# Altium PCB FRM-X33_LAN_UART Adapter.PcbDoc
Units mm, origin at the board's own origin, x right, y up, seen from the top; angles counter-clockwise.
Board outline 35 x 20 mm, 2 copper layers (Top Layer, Bottom Layer); 13 components, 10 nets, 57 pads, 15 vias.
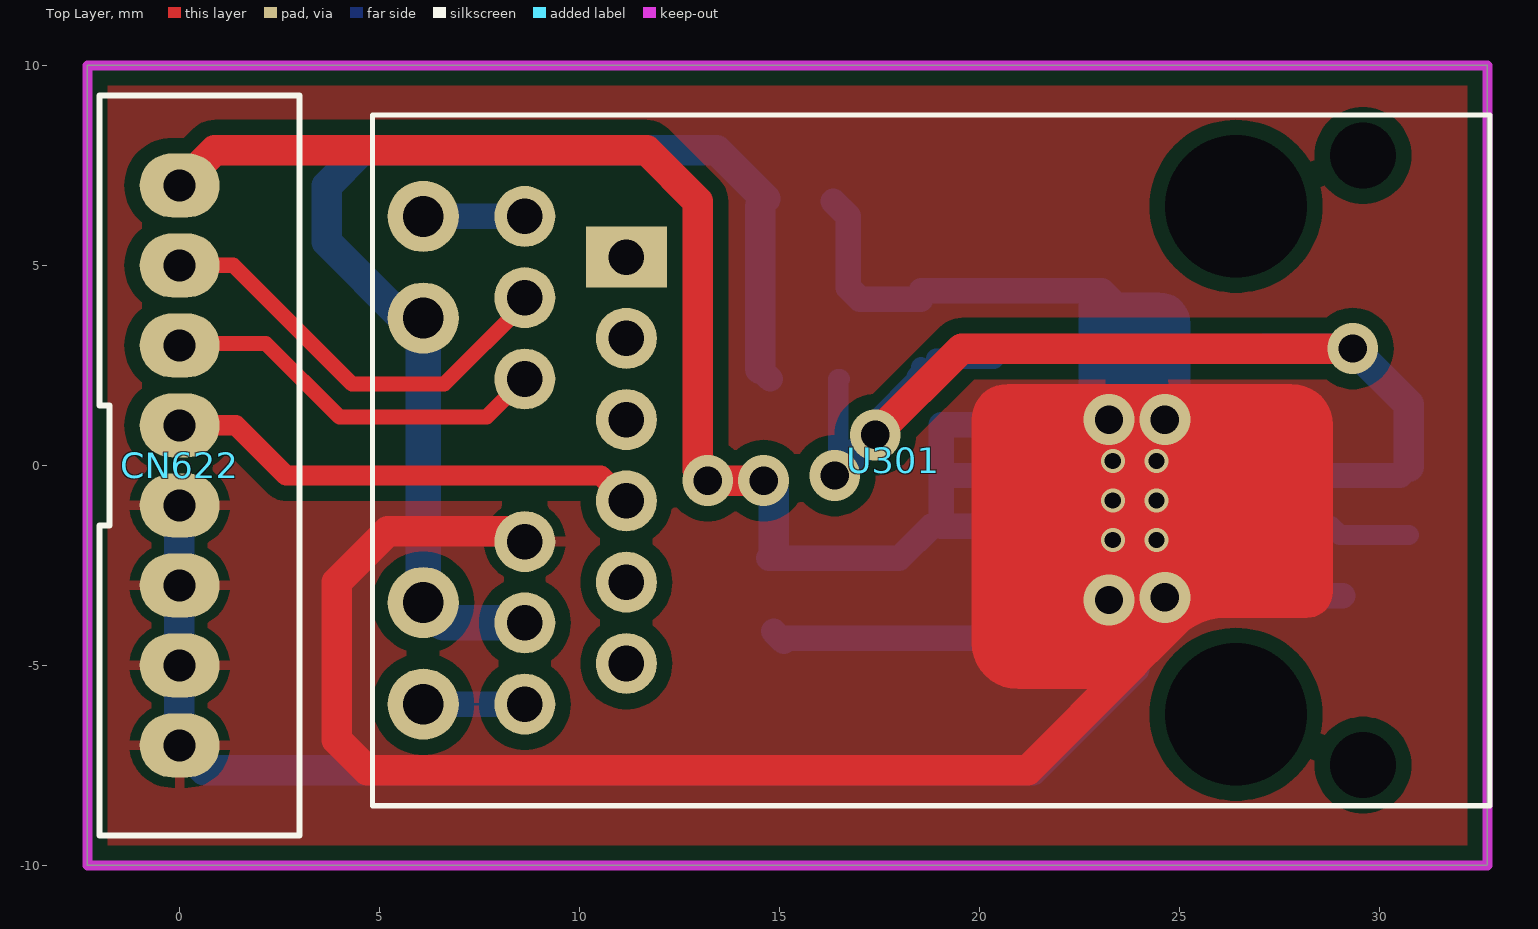
[diagram p0: Top Layer view]
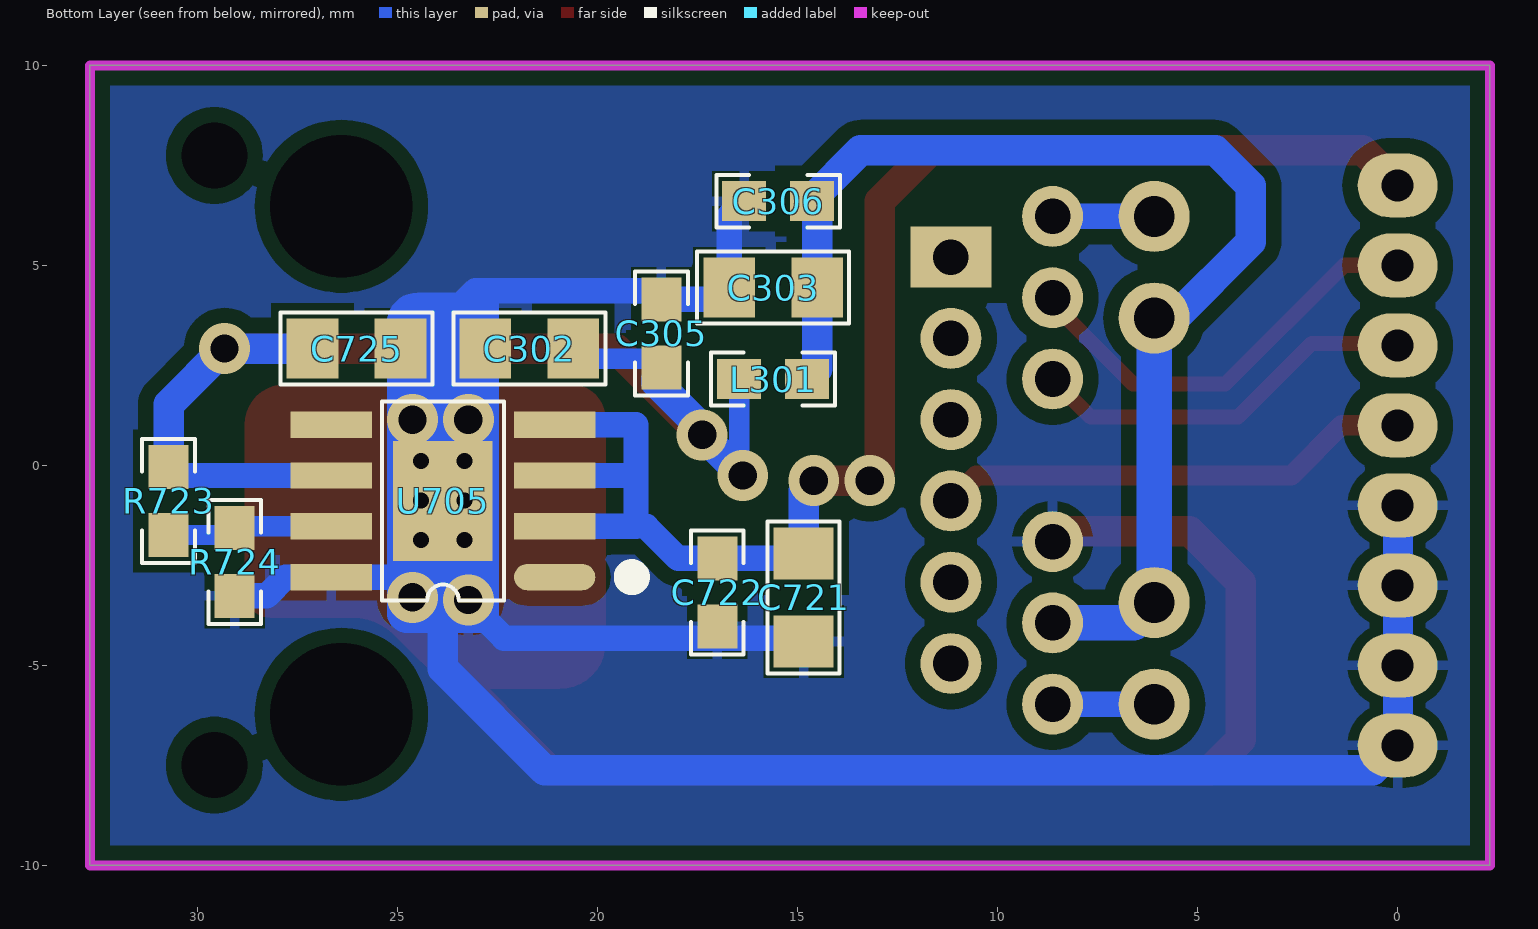
[diagram p1: Bottom Layer view, seen from below]
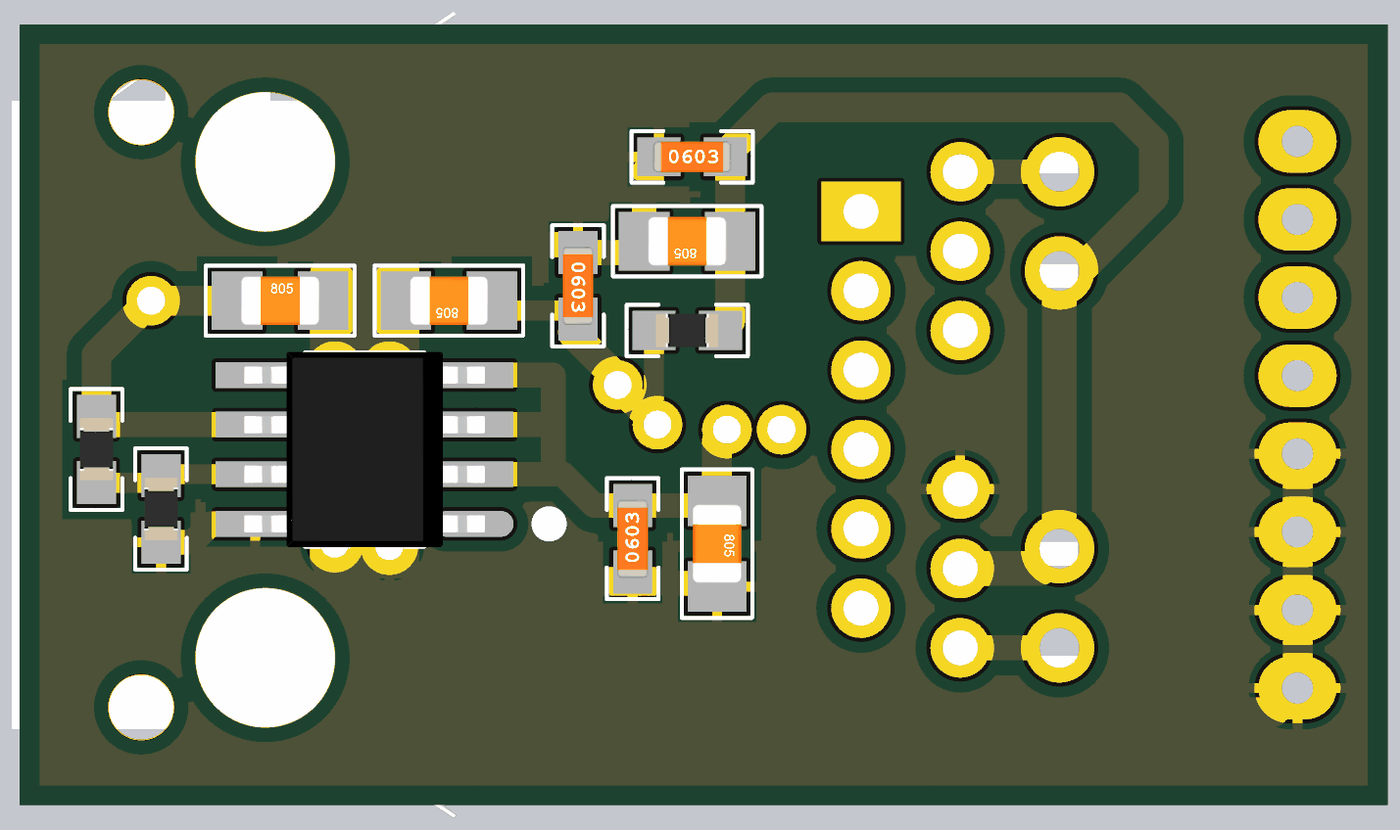
[diagram p2: 3D render of the assembled board from below, using the file's embedded part models]

## Layer stack, top to bottom
Top Solder: solder mask 0.0102, Solder Resist, Dk 3.5
Top Layer: signal copper 0.0356
Dielectric 1: dielectric 0.32, FR-4, Dk 4.8
Bottom Layer: signal copper 0.0356
Bottom Solder: solder mask 0.0102, Solder Resist, Dk 3.5

## Board outline
-2.3,-10 -2.3,10 32.7,10 32.7,-10

## Design rules (kind name [scope] priority, off if disabled: settings)
Clearance [All] p1: gap=0.381
PolygonConnect [All] p1: connectstyle=Relief reliefconductorwidth=0.254 reliefentries=4 polygonreliefangle="90 Angle" airgapwidth=0.254
RoutingVias [All] p1: holewidth=0.711 width=1.27 viastyle="Through Hole" minholewidth=0.711 minwidth=1.27 maxholewidth=0.711 maxwidth=1.27
SolderMaskExpansion [All] p1: expansion=0.102
Width [All] p1: maxlimit=1.016 minlimit=0.254 preferedwidth=0.381 minimp=50.000000 maximp=50.000000 favimp=50.000000
30 further rules are at their usual default settings.

## Components (designator, comment, footprint, x,y, rotation, side; value= is the part's Value field where it differs from the comment)
C302 "C2012X7R1A106K" 0805C 21.717,2.921 r0 bottom
C303 "C2012X7R1A106K" 0805C 15.621,4.445 r0 bottom
C305 "C1608X7R1E104K" 0603C 18.415,3.302 r90 bottom
C306 "C1608X7R1E104K" 0603C 15.494,6.604 r0 bottom
C721 "C2012X7R1A106K" 0805C 14.859,-3.302 r270 bottom
C722 "C1608X7R1E105K" 0603C 17.018,-3.175 r270 bottom
C725 "C2012X7R1A106K" 0805C 26.035,2.921 r180 bottom
CN622 "B8B-PH-K-S" B8B-PH-K-S 0.508,0 r270 top
L301 "MPZ1608S101A" 0603R 15.621,2.159 r0 bottom
R723 "ERJ3GEYJ472V" 0603R 30.734,-0.889 r90 bottom
R724 "ERJ3GEYJ472V" 0603R 29.083,-2.413 r90 bottom
U301 "USR-K3" USR-K3 6.096,-5.969 r0 top
U705 "RT9018A-18PSP" SOP_8 23.876,-0.889 r0 bottom

## Footprints (in the part's own frame and the unit in brackets; to place one, negate y for a bottom-side part, rotate by r counter-clockwise, add the part's x,y. Pads: shape width x height; smd on the part's side, far side on the other; paste and mask are expansions set on the pad)
0603C [mm]
  rect 1.1x1 smd: 1(-0.85,0) 2(0.85,0)
  Top Layer pour cut-out: -0.254,0.635 0.254,0.635 0.254,-0.635 -0.254,-0.635
  silkscreen extent -1.55,-0.66 1.55,0.66, body extent -1,-0.39 1,0.39, height 0.79
0603R [mm]
  rect 1.1x1 smd: 1(-0.85,0) 2(0.85,0)
  Top Layer pour cut-out: -0.254,-0.635 0.254,-0.635 0.254,0.635 -0.254,0.635
  silkscreen extent -1.55,-0.66 1.55,0.66, body extent -0.8,-0.42 0.8,0.43, height 0.45
0805C [mil]
  rect 51x59 smd: 1(-43.31,0) 2(43.31,0)
  Top Layer pour cut-out: 15,35 15,-35 -15,-35 -15,35
  silkscreen extent -75,-35 75,35, body extent -39,-25 39,25, height 31
B8B-PH-K-S [mm]
  oval 1.6x2 hole 0.8: 1(-7,-0.5) 2(-5,-0.5) 3(-3,-0.5) 4(-1,-0.5) 5(1,-0.5) 6(3,-0.5) 7(5,-0.5) 8(7,-0.5)
  silkscreen extent -9.25,-2.5 9.25,2.5, body extent -8.95,-2.25 8.95,2.25, height 6
SOP_8 [mil]
  oval 80x26 smd: 1(-110,75)
  rect 80x26 smd: 2(-110,25) 3(-110,-25) 4(-110,-75) 5(110,-75) 6(110,-25) 7(110,25) 8(110,75)
  rect 98x118 smd: 9(0,0)
  silkscreen extent -192,-98 60,98, body extent -121,-98 121,98, height 79
USR-K3 [mil]
  rect 80x60 hole 35: 1(200,440)
  round 60 hole 35: 2(200,360) 3(200,280) 4(200,200) 5(200,120) 6(200,40) 7(100,480) 8(100,400) 9(100,320) 10(100,160) 11(100,80) 12(100,0)
  round 70 hole 40: 13(0,480) 14(0,380) 15(0,100) 16(0,0)
  round 60 hole 140: ""(800,-10) ""(800,490)
  round 60 hole 65: ""(925,-60) ""(925,540)
  silkscreen extent -50,-100 1050,580, body extent -19,-172 1056,642, height 675

## Part data
C302 C303 C721 C725: "Capacitor,Ceramic,10uF,10V,X7R,10%"
C305 C306: "Capacitor,Ceramic,100nF,25V,X7R,10%"
C722: "Capacitor,Ceramic,1uF,25V,X7R,10%"
CN622: library part B8B-PH-K-S_ROW, "8 Position 2mm Pitch/Disconnectable Crimp style Connectors"
L301: "Bead, Ferrite,100R@100Mhz,3A"
R723 R724: "Thick Film Chip Resistors,4.7K,0603,5%"
U705: "Maximum 3A, Ultra Low Dropout Regulator"

## Via types
v1: diameter 1.27, hole 0.711, Top Layer to Bottom Layer, 9 vias
v2: diameter 0.6, hole 0.406, Top Layer to Bottom Layer, 6 vias

## Nets (pads, with @x,y where several pads share a name; then routed paths per layer and width w, separated by ;. In a path a pad name is that pad's centre, name@x,y a point inside that pad or via, vN(x,y) a via of type N, cw(c..) or ccw(c..) an arc to the next point about the centre after c; other vN are vias at no path point)
+3.3V: C302.1 C305.1 C725.1 L301.2 R723.2 U705.6 | length 30.3
  Top Layer w0.762: v1(17.399,0.762) 19.558,2.921 v1@29.21,2.921
  Bottom Layer w0.508: v1@16.256,-0.254 v1@16.256,0 ; v1(16.383,-0.254) 16.471,-0.166 L301.2 L301.2@16.51,2.159 ; C305.1@18.542,2.159 C305.1@18.542,2.452 ; 18.923,2.667 20.363,2.667 C302.1 ; R723.2@30.519,-0.254 R723.2
  Bottom Layer w0.635: U705.6 R723.2@30.519,-0.254
  Bottom Layer w0.762: v1@16.471,-0.166 v1(17.399,0.762) ; v1@17.526,1.055 18.542,2.071 C305.1@18.542,2.159 ; C725.1 v1(29.337,2.921) 30.734,1.524 R723.2
+5V: C721.1 C722.1 CN622.1 U705.2 U705.3 U705.4 | length 37.8
  Top Layer w0.762: CN622.1 0.882,7.874 11.684,7.874 12.954,6.604 12.954,-0.127 v1(13.208,-0.381) v1(14.605,-0.381)
  Bottom Layer w0.635: v1@14.383,-0.54 v1@14.7,-0.54 ; C721.1@14.859,-2.198 14.857,-2.2 14.732,-2.325 C722.1 17.995,-2.325 18.796,-1.524 ; 19.05,-0.254 U705.3 ; U705.2 19.05,-1.524 19.05,1.016 U705.4
  Bottom Layer w0.762: v1(14.605,-0.381) 14.859,-0.635 C721.1@14.859,-2.198
GND: C302.2 C303.2 C305.2 C306.2 C721.2 C722.2 C725.2 CN622.5 CN622.6 CN622.7 CN622.8 R724.1 U301.10 U705.8 U705.9 | length 103.8
  Top Layer w0.635: U301.10 U301.10@8.636,-1.651
  Top Layer w0.762: U301.10@8.636,-1.651 5.207,-1.651 3.937,-2.921 3.937,-6.858 4.699,-7.62 21.209,-7.62 23.876,-4.953 23.876,-2.409 v2(23.336,-1.869)
  Bottom Layer w0.635: C721.2@14.859,-4.152 C721.2@15.109,-4.402 ; C721.2@15.025,-4.318 22.352,-4.318 23.241,-3.429 v1(23.241,-3.365) 23.241,-1.964 v2(23.336,-1.869) ; C306.2 16.721,6.227 C303.2 17.014,4.152 18.542,4.152 18.542,4.369 23.063,4.369 23.876,3.556 23.876,2.921 ; C302.2 23.876,2.921 ; U705.9@23.876,-1.064 U705.9@24.426,-1.614 ; U705.9 23.876,2.921 ; U705.9@24.146,-1.159 24.426,-1.439 U705.9@24.426,-1.614 ; C725.2 23.876,2.921 ; R724.1 28.282,-3.263 27.813,-2.794 U705.8 25.019,-2.794 24.426,-2.201 v2(24.426,-1.869) U705.9@24.426,-1.614
  Bottom Layer w0.762: CN622.5@0,-0.762 0,-6.992 0.628,-7.62 21.336,-7.62 23.876,-5.08 U705.9@23.876,-1.064
  other v1: 24.638,-3.302 23.241,1.143 24.638,1.143
  other v2: 23.336,-0.879 24.426,-0.879 23.336,0.111 24.426,0.111
NetR723_1: R723.1 R724.2 U705.7 | length 4.2
  Bottom Layer w0.508: U705.7 28.79,-1.524 29.005,-1.739 R723.1
NetU301_7: U301.7 U301.13 | length 2.5
  Bottom Layer w0.635: U301.13 U301.7
NetU301_12: U301.12 U301.16 | length 2.5
  Bottom Layer w0.635: U301.16 U301.12
USART2_RX: CN622.3 U301.9 | length 9.8
  Top Layer w0.381: CN622.3@0.008,3.048 2.159,3.048 4,1.206 7.683,1.206 U301.9
USART2_TX: CN622.2 U301.8 | length 10.8
  Top Layer w0.381: CN622.2 1.35,5 4.318,2.032 6.623,2.032 8.636,4.045 U301.8
USR-K3_RST: CN622.4 U301.4 | length 12
  Top Layer w0.508: CN622.4 1.413,1 2.667,-0.254 10.541,-0.254 U301.4
V_ETH: C303.1 C306.1 L301.1 U301.11 U301.14 U301.15 | length 31
  Bottom Layer w0.635: L301.1@14.521,2.409 L301.1 ; C306.1@14.521,6.481 C306.1 C306.1@14.644,6.667
  Bottom Layer w0.762: U301.14 5.588,3.683 3.683,5.588 3.683,6.985 4.572,7.874 13.437,7.874 C306.1@14.644,6.667 ; L301.1@14.521,2.409 C303.1 C306.1@14.521,6.481
  Bottom Layer w0.889: U301.14 U301.15 6.604,-3.937 U301.11
pads on no net: U301. U301.1 U301.2 U301.3 U301.5 U301.6 U705.1 U705.5

## Polygon pours and split planes (outlines as drawn)
GND on Bottom Layer "GND_L02_P-001" (solid, remove dead copper, pour order 6): 32.7,10 -2.286,10 -2.286,-10 32.7,-10
GND on Top Layer "GND_L02_P-001" (solid, remove dead copper, pour order 8): 32.7,10 32.7,-10 -2.286,-10 -2.286,10

## Keep-outs
Keep-Out Layer:
  lines w0.25: -2.3,-10 -2.3,10 ; -2.286,-10 32.7,-10 32.7,10 -2.286,10

## Other copper
Top Layer:
  region net GND: 27.813,2.032 20.701,2.032 ccw(c20.701,1.143) 19.812,1.143 19.812,-4.445 ccw(c20.955,-4.445) 20.955,-5.588 23.749,-5.588 25.093,-4.244 cw(c26.14,-5.29) 26.14,-3.81 28.194,-3.81 ccw(c28.194,-3.175) 28.829,-3.175 28.829,1.016 ccw(c27.813,1.016)
Bottom Layer:
  region net GND: 25.273,-3.683 25.273,3.556 ccw(c24.511,3.556) 24.511,4.318 22.479,4.318 22.479,-4.191 24.765,-4.191 ccw(c24.765,-3.683)